# Altium PCB PPE2.PcbDoc (part 2 of 2)
Units mm, origin at the board's own origin, x right, y up, seen from the top; angles counter-clockwise.
Board outline 200 x 160 mm, 2 copper layers (Top Layer, Bottom Layer); 211 components, 151 nets, 640 pads, 213 vias.
Unrouted connection lines stored in the file: 3.
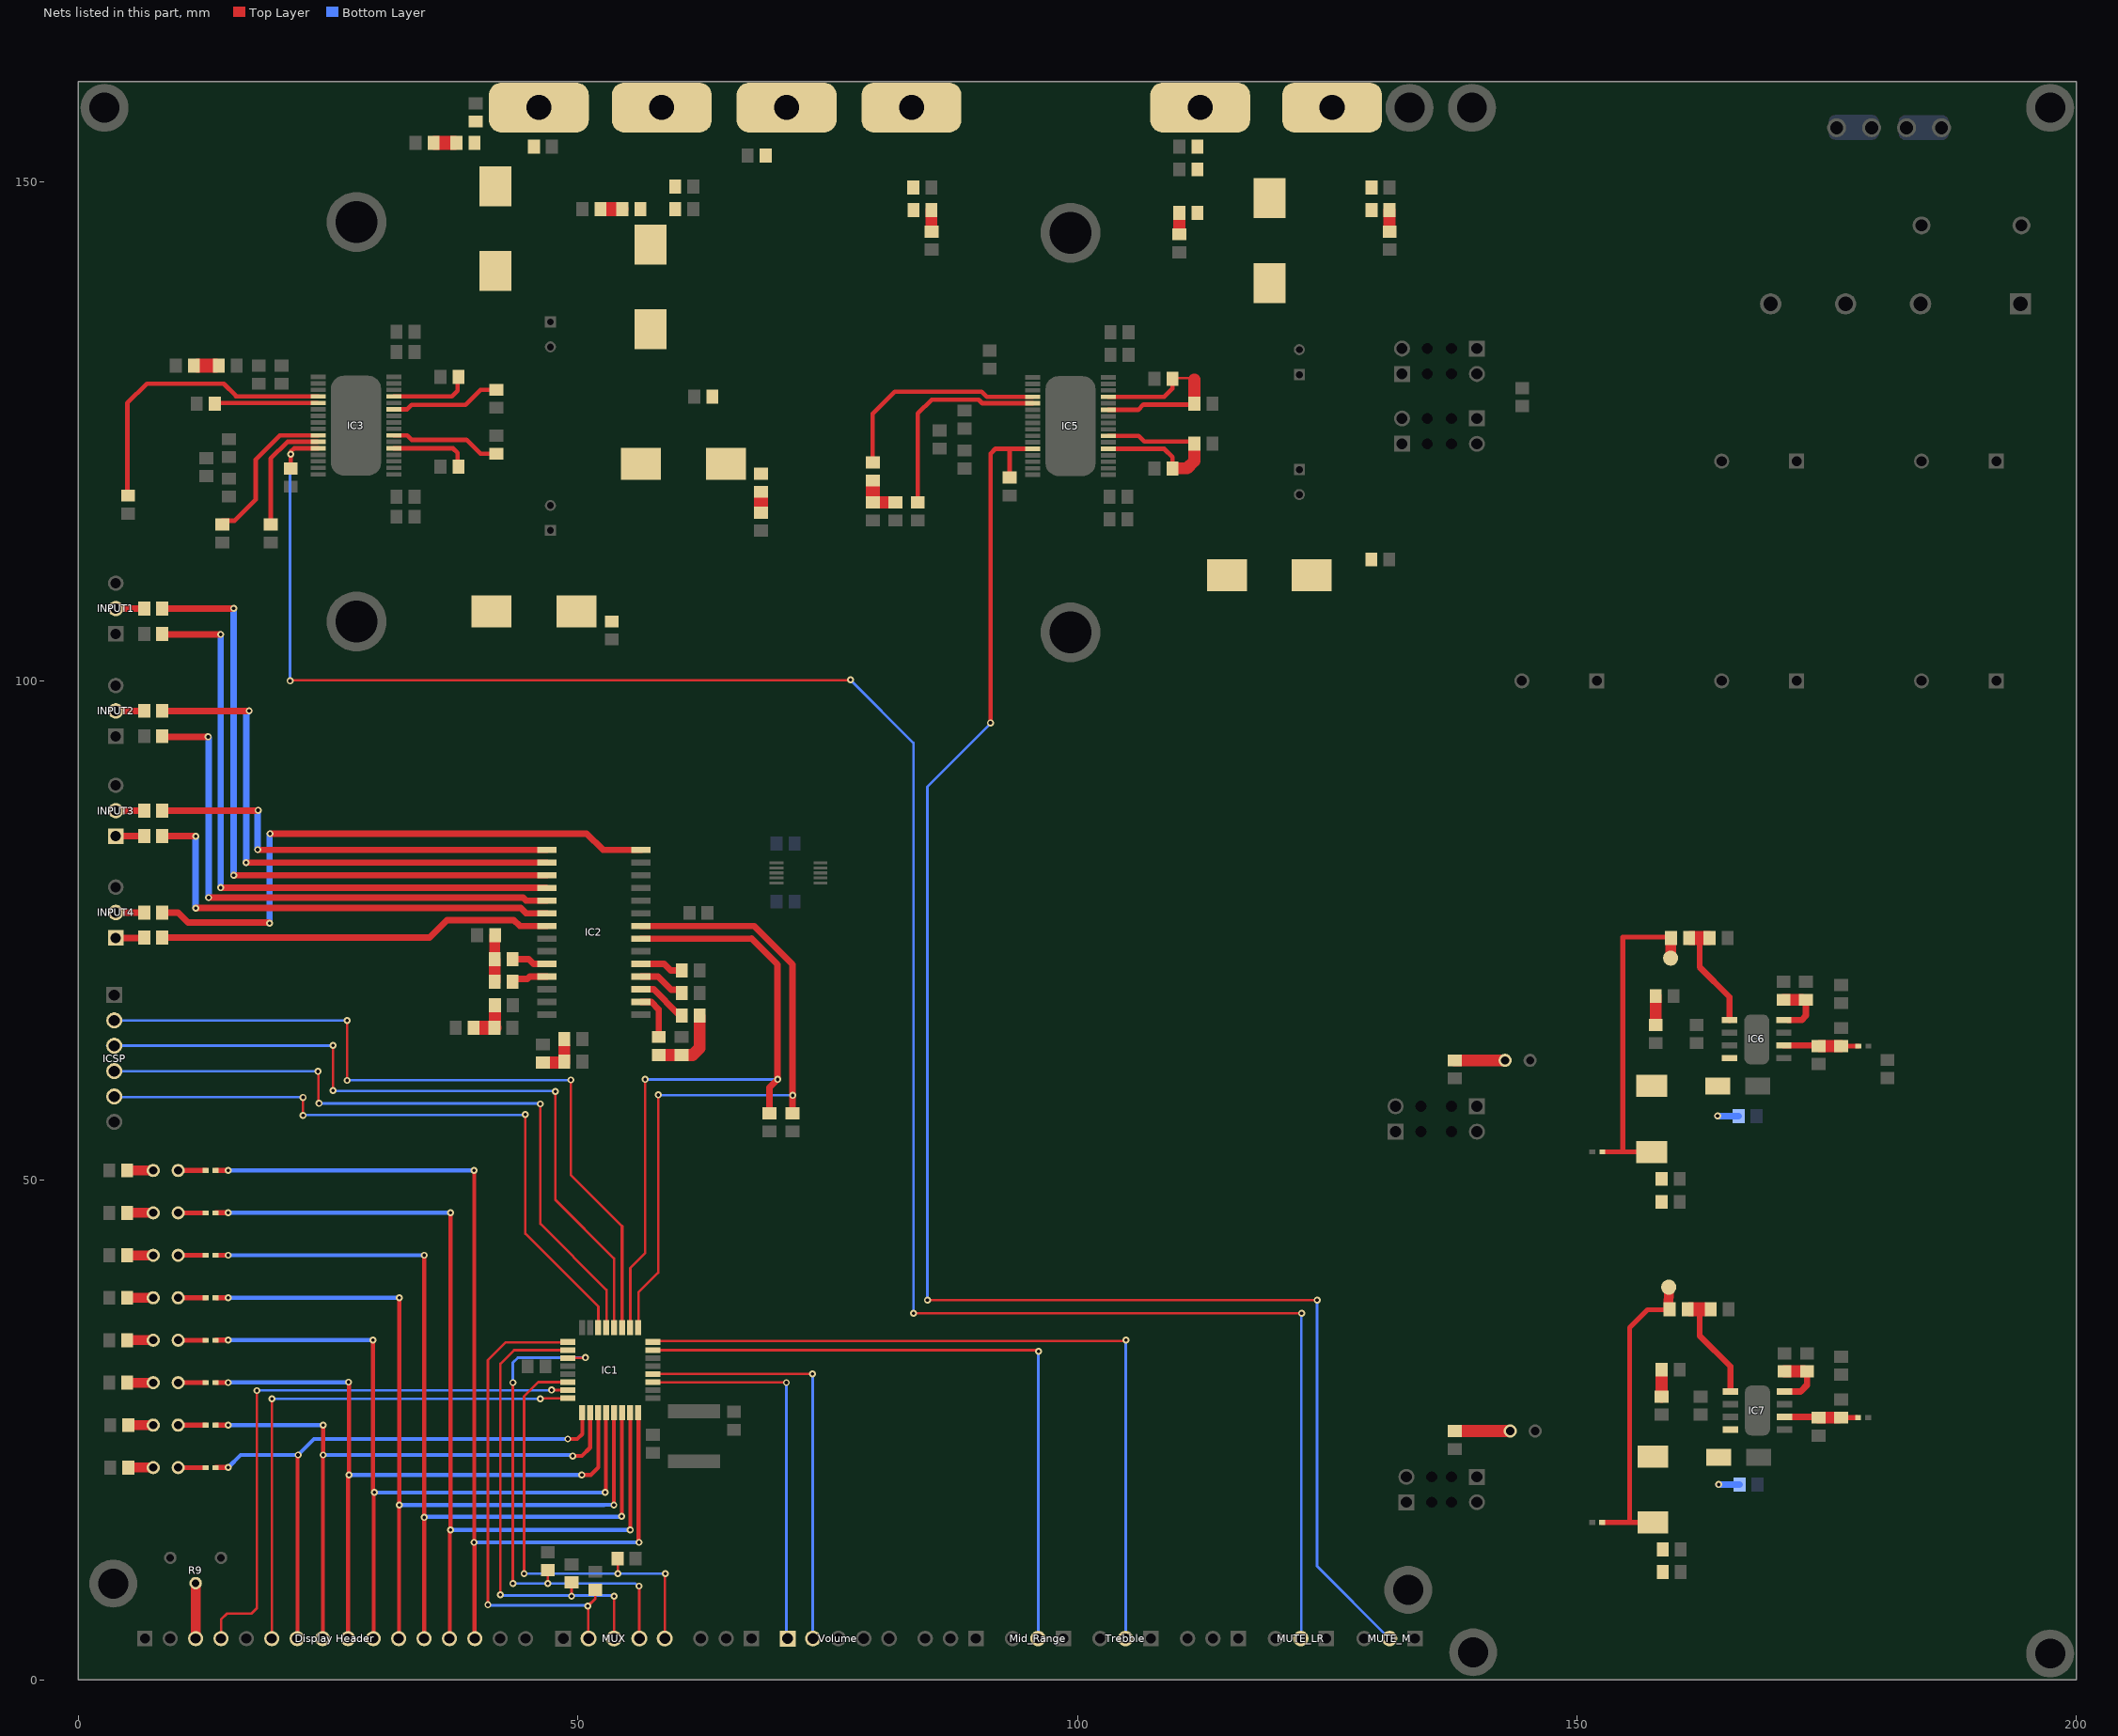
[diagram p2: the nets of this part, all layers, seen from the top]

## Via types
v1: diameter 0.7, hole 0.35, Top Layer to Bottom Layer, 159 vias
v2: diameter 1.27, hole 0.711, Top Layer to Bottom Layer, 38 vias
v3: diameter 1.1, hole 0.6, Top Layer to Bottom Layer, 16 vias

## Nets (pads, with @x,y where several pads share a name; then routed paths per layer and width w, separated by ;. In a path a pad name is that pad's centre, name@x,y a point inside that pad or via, vN(x,y) a via of type N, cw(c..) or ccw(c..) an arc to the next point about the centre after c; other vN are vias at no path point) (continued)
INPUTL_3: C11.1 INPUT3.1 | length 3
  Top Layer w0.254: INPUT3.1@3.7,84.5 INPUT3.1@3.75,84.45 ; C11.1@6.65,84.45 C11.1@6.675,84.475
  Top Layer w0.65: INPUT3.1@3.75,84.45 C11.1@6.6,84.45
INPUTL_4: C5.1 INPUT4.1 | length 2.9
  Top Layer w0.254: C5.1@6.57,74.27 C5.1@6.6,74.3
  Top Layer w0.65: INPUT4.1@3.75,74.27 C5.1@6.57,74.27
INPUTR_1: C13.1 INPUT1.2 | length 3.1
  Top Layer w0.254: C13.1@6.79,107.24 C13.1@6.85,107.3
  Top Layer w0.65: INPUT1.2@3.75,107.24 C13.1@6.79,107.24
INPUTR_2: C14.1 INPUT2.2 | length 2.8
  Top Layer w0.254: C14.1@6.49,96.99 C14.1@6.55,97.05
  Top Layer w0.65: INPUT2.2@3.75,96.99 C14.1@6.49,96.99
INPUTR_3: C6.1 INPUT3.2 | length 3.2
  Top Layer w0.254: INPUT3.2@3.45,87.05 3.5,87 INPUT3.2@3.75,87
  Top Layer w0.65: INPUT3.2@3.75,87 C6.1@6.65,87
INPUTR_4: C7.1 INPUT4.2 | length 3.1
  Top Layer w0.254: INPUT4.2@3.55,76.75 3.61,76.81 INPUT4.2@3.75,76.81 ; C7.1@6.59,76.81 C7.1@6.6,76.8
  Top Layer w0.65: INPUT4.2@3.75,76.81 C7.1@6.59,76.81
L_IN1: C3.2 IC2.4 | length 63.9
  Top Layer w0.254: C3.2@8.45,104.7 C3.2@8.5,104.65 ; v1(14.25,79.3) v1@14.265,79.285 ; IC2.4@46.835,79.285 IC2.4@46.9,79.35
  Top Layer w0.65: C3.2@8.5,104.65 v1(14.25,104.65) ; v1@14.265,79.285 IC2.4@46.835,79.285
  Bottom Layer w0.65: v1(14.25,79.3) v1(14.25,104.65)
L_IN2: C4.2 IC2.5 | length 54.6
  Top Layer w0.254: C4.2@8.5,94.45 C4.2@8.55,94.4
  Top Layer w0.65: C4.2@8.55,94.4 v1(13,94.4) ; v1(13.05,78.3) 44.528,78.3 44.828,78 IC2.5@46.901,78
  Bottom Layer w0.65: v1(13,94.4) 13,94.386 13.05,94.336 v1(13.05,78.3)
L_IN3: C11.2 IC2.6 | length 45.9
  Top Layer w0.65: C11.2@8.4,84.45 v1(11.75,84.45) ; v1(11.75,77.25) 44.3,77.25 44.82,76.73 IC2.6@46.901,76.73
  Bottom Layer w0.65: v1(11.75,77.25) v1(11.75,84.45)
L_IN4: C5.2 IC2.7 | length 39.5
  Top Layer w0.65: C5.2@8.4,74.3 35.15,74.3 36.9,76.05 43.6,76.05 44.19,75.46 IC2.7@46.901,75.46
LINN: C73.2 IC3.11 | length 12.1
  Top Layer w0.254: C73.2@19.26,115.555 C73.2@19.26,115.655 ; IC3.11@23.935,123.93 IC3.11@23.96,123.955
  Top Layer w0.45: C73.2@19.26,115.655 19.26,122.255 20.935,123.93 IC3.11@23.935,123.93
LNIP: C49.2 IC3.10 | length 15.6
  Top Layer w0.254: 20.16,124.555 20.185,124.58
  Top Layer w0.45: C49.2@14.34,115.97 14.4,116.03 15.635,116.03 17.76,118.155 17.76,122.155 20.16,124.555 ; 20.185,124.58 IC3.10@24.01,124.58
MidRangeADC: IC1.23 Mid_Range.2 | length 67.2
  Top Layer w0.254: IC1.23@57.5,33 95.879,33 96.004,32.875 v1(96.125,32.875)
  Bottom Layer w0.254: Mid_Range.2@96.125,4.375 96.094,4.406 96.094,32.844 v1(96.125,32.875)
MIN_L: C23.1 IC2.17 | length 5
  Top Layer w0.254: C23.1@60.2,66.7 C23.1@60.4,66.5
  Top Layer w0.65: IC2.17@56.325,69.11 57.59,69.11 C23.1@60,66.7
MIN_R: C20.1 IC2.10 | length 3.6
  Top Layer w0.254: C20.1@43.575,72.275 C20.1@43.7,72.15
  Top Layer w0.65: C20.1@43.7,72.15 45.075,72.15 45.575,71.65 IC2.10@46.901,71.65
MISO: IC1.28 ICSP.3 | length 75.2
  Top Layer w0.254: v1(25.5,59) v1(25.5,63.5) ; v1(47.75,58.9) 47.75,48.05 53.625,42.175 53.625,35.575 IC1.28@53.65,35.55
  Bottom Layer w0.254: ICSP.3@2.898,63.478 25.478,63.478 v1(25.5,63.5) ; v1(25.5,59) 25.55,58.95 47.7,58.95 v1(47.75,58.9)
MOSI: IC1.27 ICSP.2 | length 78.7
  Top Layer w0.254: v1(26.9,60) v1(26.9,66) ; v1(49.3,60.05) 49.3,50.55 54.425,45.425 ; IC1.27@54.425,35.675 IC1.27@54.45,35.65
  Top Layer w0.3: IC1.27@54.425,35.675 54.425,45.425
  Bottom Layer w0.254: ICSP.2@3.2,65.995 3.6,65.995 26.895,65.995 v1(26.9,66) ; v1(26.9,60) 26.925,60.025 49.275,60.025 v1(49.3,60.05)
MOUT_L: C24.1 IC2.16 | length 4.8
  Top Layer w0.65: IC2.16@56.325,67.84 57.357,67.84 58.1,67.097 58.1,64.621 58,64.521 C24.1@58,64.4
MOUT_R: C22.1 IC2.11 | length 3.3
  Top Layer w0.254: C22.1@43.7,70.025 C22.1@43.825,70.15
  Top Layer w0.65: C22.1@43.825,70.15 44.95,70.15 45.18,70.38 IC2.11@46.901,70.38
MUTE: IC3.12 MUTE_LR.2 R23.2 | length 220.7
  Top Layer w0.254: v1(21.2,100) 21.25,100.05 77.25,100.05 v1(77.3,100.1) ; v1@21.26,122.54 v1(21.26,122.69) ; v1(83.6,36.7) v1(122.45,36.7)
  Top Layer w0.45: R23.2@21.26,121.255 v1@21.26,122.54 ; v1(21.26,122.69) 21.26,122.955 21.585,123.28 IC3.12@24.01,123.28
  Bottom Layer w0.254: v1(21.2,100) v1@21.2,122.7 ; v1(77.3,100.1) 83.6,93.8 v1(83.6,36.7) ; MUTE_LR.2@122.35,4.35 122.412,4.412 122.412,36.662 v1(122.45,36.7)
MUTE_M: IC5.12 MUTE_M.2 R34.2 | length 170.5
  Top Layer w0.254: v1(85,38) v1(124,38)
  Top Layer w0.45: v1@91.32,95.8 91.32,122.76 91.795,123.235 93.22,123.235 ; R34.2@93.22,120.36 93.22,123.235 ; IC5.12@95.532,123.235 93.22,123.235
  Bottom Layer w0.254: v1(85,38) 85,89.4 91.3,95.7 v1(91.3,95.8) ; v1(124,38) 124,11.375 MUTE_M.2@131.25,4.125
MUX0: IC1.1 MUX.2 R40.2 | length 48
  Top Layer w0.254: v1(41,7.5) 41,32 42.775,33.775 IC1.1@48.65,33.775 ; MUX.2@51.08,4.125 51.04,4.165 51.04,7.335 v1(51,7.375) 51.75,8.125 R40.2@51.75,8.875
  Bottom Layer w0.254: v1(41,7.5) 41.062,7.438 50.937,7.438 v1(51,7.375)
MUX1: IC1.2 MUX.3 R39.2 | length 47.5
  Top Layer w0.254: v1(42.25,8.5) 42.25,31.625 43.625,33 IC1.2@49,33 ; v1(49.375,8.375) R39.2@49.375,9.625 ; MUX.3@53.62,4.125 53.623,4.127 53.623,8.373 v1(53.625,8.375)
  Bottom Layer w0.254: v1(42.25,8.5) 42.312,8.438 v1@49.312,8.438 ; v1(49.375,8.375) v1@49.312,8.438 ; v1(53.625,8.375) 53.562,8.438 v1@49.312,8.438
MUX2: IC1.3 MUX.4 R38.2 | length 50.3
  Top Layer w0.254: v1(43.5,9.625) v1(43.5,29.75) ; v1(47,9.625) R38.2@47,10.625 ; IC1.3@49,32.2 49.025,32.225 50.725,32.225 v1(50.75,32.25) ; v1(56.125,9.375) 56.143,9.357 56.143,4.143 MUX.4@56.16,4.125
  Bottom Layer w0.254: v1(43.5,9.625) v1(47,9.625) 55.754,9.625 56.004,9.375 v1(56.125,9.375) ; v1(43.5,29.75) 43.5,31.75 44,32.25 v1(50.75,32.25)
MUX3: IC1.6 MUX.5 R37.2 | length 44.7
  Top Layer w0.254: v1(44.625,10.625) 44.625,28.375 46.05,29.8 IC1.6@49,29.8 ; v1(54,10.625) R37.2@54,12 ; MUX.5@58.7,4.125 58.725,4.15 58.725,10.6 v1(58.75,10.625)
  Bottom Layer w0.254: v1(44.625,10.625) v1(54,10.625) v1(58.75,10.625)
NetC8_1: C8.1 R10.1 | length 1.8
  Top Layer w1.4: C8.1@11.96,131.555 R10.1@13.76,131.555
NetC20_2: C20.2 C22.2 R1.2 | length 4.5
  Top Layer w0.254: R1.2@41.675,74.25 R1.2@41.7,74.275
  Top Layer w1.1: C20.2@41.675,72.15 R1.2@41.675,74.5
  Top Layer w1.2: C22.2@41.675,69.896 C20.2@41.675,72.05
NetC23_2: C23.2 C24.2 R3.2 | length 7.5
  Top Layer w1.2: C24.2@58.1,62.546 R3.2@60.354,62.546 ; R3.2@60.4,62.546 61.497,62.546 62.2,63.249 C23.2@62.2,66.4
NetC25_2: C25.2 C26.2 R5.2 | length 4.2
  Top Layer w0.254: R5.2@39.7,65.4 R5.2@39.829,65.271
  Top Layer w1.2: C26.2@41.7,65.321 C25.2@41.7,67.525
  Top Layer w1.4: R5.2@39.829,65.271 C26.2@41.65,65.271
NetC27_2: C27.2 C28.2 R7.2 | length 3.5
  Top Layer w1.2: C27.2@46.5,61.8 48.654,61.8 R7.2@48.654,61.9 ; R7.2@48.654,62.2 48.654,63.397
NetC34_1: C34.1 R11.2 | length 2.1
  Top Layer w0.254: C34.1@37.66,153.855 C34.1@37.76,153.755
  Top Layer w1.4: R11.2@35.66,153.855 C34.1@37.66,153.855
NetC39_2: C39.2 R12.1 | length 2.1
  Top Layer w0.254: C39.2@54.364,147.219 C39.2@54.46,147.124
  Top Layer w1.4: R12.1@52.406,147.219 C39.2@54.364,147.219
NetC40_1: C40.1 R13.2 | length 1.8
  Top Layer w1.4: R13.2@68.35,117.069 C40.1@68.35,118.84
NetC45_2: C45.2 R15.1 | length 2.1
  Top Layer w1.2: R15.1@85.393,145.006 C45.2@85.393,147.133
NetC59_1: C59.1 R29.1 R30.1 | length 4
  Top Layer w1.2: R30.1@79.52,117.86 R29.1@81.774,117.86
  Top Layer w1.4: R30.1@79.52,118.006 C59.1@79.52,119.758
NetC61_1: C61.1 R32.2 | length 2.1
  Top Layer w0.254: R32.2@110.3,144.8 R32.2@110.32,144.82
  Top Layer w1.2: R32.2@110.22,144.82 C61.1@110.22,146.86
NetC68_2: C68.2 R33.1 | length 2.1
  Top Layer w1.2: R33.1@131.249,144.991 C68.2@131.249,147.128
NetC79_2: C79.2 C80.2 L8.2 pad.14 R17.1 SB_9V.1 | length 33.2
  Top Layer w0.5: SB_9V.1@152.612,52.842 154.738,52.842 ; L8.2@157.51,52.842 154.738,52.842 ; R17.1@159.389,74.342 154.589,74.342 154.589,52.991 154.738,52.842
  Top Layer w1.1: pad.14@159.389,72.242 R17.1@159.389,74.142
NetC81_2: C81.2 C82.2 L9.2 pad.13 R21.1 SB_5V.2 | length 30.3
  Top Layer w0.5: SB_5V.2@152.54,15.74 152.736,15.74 152.739,15.743 155.289,15.743 155.489,15.743 ; L9.2@156.589,15.743 155.489,15.743 ; R21.1@158.989,37.043 157.089,37.043 155.289,35.243 155.289,15.943 155.489,15.743
  Top Layer w1: R21.1@159.178,37.037 pad.13@159.2,39.3
NetC84_1: C84.1 R45.1 | length 2.7
  Top Layer w1.2: R45.1@157.889,65.742 C84.1@157.889,68.442
NetC89_1: C89.1 R46.1 | length 2.5
  Top Layer w1.2: R46.1@158.489,28.343 C89.1@158.489,30.843
NetLED1_1: LED1.1 SB1.1 | length 2.8
  Top Layer w0.5: LED1.1@10,50.99 SB1.1@12.75,50.99
NetLED1_2: LED1.2 R2.2 | length 2.6
  Top Layer w1: R2.2@4.9,50.99 LED1.2@7.5,50.99
NetLED2_1: LED2.1 SB2.1 | length 2.8
  Top Layer w0.5: LED2.1@10,46.74 SB2.1@12.75,46.74
NetLED2_2: LED2.2 R4.2 | length 2.6
  Top Layer w1: R4.2@4.9,46.74 LED2.2@7.5,46.74
NetLED3_1: LED3.1 SB3.1 | length 2.8
  Top Layer w0.5: LED3.1@10,42.49 SB3.1@12.75,42.49
NetLED3_2: LED3.2 R6.2 | length 2.6
  Top Layer w1: R6.2@4.9,42.49 LED3.2@7.5,42.49
NetLED4_1: LED4.1 SB4.1 | length 2.8
  Top Layer w0.5: LED4.1@10,38.24 SB4.1@12.75,38.24
NetLED4_2: LED4.2 R8.2 | length 2.6
  Top Layer w1: R8.2@4.9,38.24 LED4.2@7.5,38.24
NetLED5_1: LED5.1 SB5.1 | length 2.8
  Top Layer w0.5: LED5.1@10,33.99 SB5.1@12.75,33.99
NetLED5_2: LED5.2 R14.2 | length 2.6
  Top Layer w1: R14.2@4.9,33.99 LED5.2@7.5,33.99
NetLED6_1: LED6.1 SB6.1 | length 2.8
  Top Layer w0.5: LED6.1@10,29.74 SB6.1@12.75,29.74
NetLED6_2: LED6.2 R16.2 | length 2.6
  Top Layer w1: R16.2@4.9,29.74 LED6.2@7.5,29.74
NetLED7_1: LED7.1 SB7.1 | length 2.8
  Top Layer w0.5: LED7.1@10,25.49 SB7.1@12.75,25.49
NetLED7_2: LED7.2 R18.2 | length 2.7
  Top Layer w0.254: R18.2@4.9,25.24 R18.2@5.15,25.49
  Top Layer w1: R18.2@5.15,25.49 LED7.2@7.5,25.49
NetLED8_1: LED8.1 SB8.1 | length 2.8
  Top Layer w0.5: LED8.1@10,21.24 SB8.1@12.75,21.24
NetLED8_2: LED8.2 R20.2 | length 2.5
  Top Layer w1: R20.2@5,21.24 LED8.2@7.5,21.24
NetLED9_1: LED9.1 R49.2 | length 5.4
  Top Layer w0.254: LED9.1@143.01,24.9 LED9.1@143.13,25.02
  Top Layer w1.2: R49.2@137.77,24.9 LED9.1@143.01,24.9
NetLED10_1: LED10.1 R50.2 | length 5
  Top Layer w0.254: LED10.1@142.61,62.01 LED10.1@142.73,62.13
  Top Layer w1.2: R50.2@137.77,62.01 LED10.1@142.61,62.01
OUT_L_1: C37.1 C38.1 C39.1 L3.2 pad.16
OUT_L_2: C34.2 C35.2 C36.2 L2.2 pad.15
OUT_M_1: C66.1 C67.1 C68.1 L7.2 pad.19 | length 0.5
  Top Layer w0.254: L7.2@123.095,110.931 L7.2@123.47,110.556
OUT_M_2: C61.2 C62.2 C63.2 L6.2 pad.20
OUT_R_1: C40.2 C41.2 C42.2 L4.2 pad.17
OUT_R_2: C43.1 C44.1 C45.1 L5.2 pad.18
OUTNL: C33.2 IC3.21 L5.1 | length 7.5
  Top Layer w0.45: IC3.21@31.586,123.28 37.52,123.28 37.96,122.84 C33.2@37.96,121.94
OUTNL_M: C65.2 C69.2 IC5.21 IC5.23 L7.1 | length 20.8
  Top Layer w0.254: C65.2@111.42,123.76 C65.2@111.52,123.66
  Top Layer w0.45: IC5.21@103.108,123.235 108.695,123.235 109.52,122.41 C69.2@109.52,121.26 C69.2@109.52,121.06 ; IC5.23@103.108,124.535 106.145,124.535 106.72,123.96 C65.2@111.32,123.96
  Top Layer w1.2: C69.2@109.623,121.275 110.989,121.275 111.72,122.006 C65.2@111.72,123.76
OUTNR: C31.2 IC3.27 L3.1 | length 10.8
  Top Layer w0.45: IC3.27@31.586,127.18 32.9,127.18 33.36,127.64 38.76,127.64 40.26,129.14 C31.2@41.56,129.14
OUTNR_M: C60.2 C64.2 IC5.27 IC5.29 L6.1 | length 20.2
  Top Layer w0.254: C60.2@109.675,130.351 109.7,130.326 111.571,130.326 111.72,130.177
  Top Layer w0.45: IC5.27@103.108,127.135 106.095,127.135 106.62,127.66 C64.2@111.32,127.66 ; IC5.29@103.108,128.435 108.695,128.435 109.52,129.26 C60.2@109.52,129.76
  Top Layer w1.2: C64.2@111.72,127.76 111.72,130.177
OUTPL: C32.2 IC3.23 L4.1 | length 10.8
  Top Layer w0.45: IC3.23@31.586,124.58 32.92,124.58 33.36,124.14 38.86,124.14 40.26,122.74 C32.2@41.66,122.74
OUTPR: C30.2 IC3.29 L2.1 | length 7.7
  Top Layer w0.45: IC3.29@31.586,128.48 37.4,128.48 37.96,129.04 C30.2@37.96,130.14
OUTPUT_SELECT: "OUTPUT SELECT.2" IC4.1 IC4.5 | length 121.6
  Top Layer w0.254: 72.192,76.7 72.192,79.092 72.9,79.8 ; 72.2,76.7 72.8,76.1 v1(82.2,76.1) ; IC4.1@74.292,79.775 72.925,79.775 72.9,79.8 ; IC4.5@74.292,81.775 73.075,81.775 72.9,81.6 72.9,79.8 ; v1@82.225,35.125 v1@113.625,35.125
  Bottom Layer w0.254: v1(82.2,35.15) v1(82.2,76.1) ; 113.61,4.165 v1@113.61,35.06
  other v1: 113.65,35.1
PA0: "Display Header.7" IC1.9 SB8.2 | length 58.7
  Top Layer w0.254: 21.911,4.125 21.955,4.17 ; v1@21.955,22.455 v1(22,22.5) ; IC1.9@50.375,26.75 IC1.9@50.45,26.675
  Top Layer w0.4: v1@14.995,21.245 v1(15,21.25) ; 21.955,4.17 v1@21.955,22.455 ; v1(49,24.1) 49.003,24.103 49.95,24.103 50.45,24.603 IC1.9@50.45,26.675
  Top Layer w0.5: SB8.2@13.755,21.245 v1@14.995,21.245
  Bottom Layer w0.4: v1(15,21.25) 16.25,22.5 v1(22,22.5) 23.6,24.1 v1(49,24.1)
PA1: "Display Header.8" IC1.10 SB7.2 | length 62.6
  Top Layer w0.254: SB7.2@13.75,25.5 SB7.2@13.755,25.495 ; v1@14.995,25.495 v1(15,25.5) ; 24.451,4.125 24.475,4.15
  Top Layer w0.4: 24.475,4.15 24.475,22.475 v1(24.5,22.5) v1(24.5,25.5) ; v1(49.5,22.4) 50.4,22.4 51.235,23.235 IC1.10@51.235,26.609
  Top Layer w0.5: SB7.2@13.755,25.495 v1@14.995,25.495
  Bottom Layer w0.4: v1(15,25.5) v1(24.5,25.5) ; v1(24.5,22.5) 49.319,22.5 49.419,22.4 v1(49.5,22.4)
PA2: "Display Header.9" IC1.11 SB6.2 | length 69.5
  Top Layer w0.254: SB6.2@13.75,29.74 SB6.2@13.755,29.745 ; v1@14.995,29.745 v1(15,29.75) ; 26.991,4.125 26.995,4.13
  Top Layer w0.4: 26.995,4.13 26.995,20.314 27.1,20.419 27.1,29.752 v1(27.058,29.794) ; v1(50.4,20.5) 51.3,20.5 52.05,21.25 IC1.11@52.05,26.396
  Top Layer w0.5: SB6.2@13.755,29.745 v1@14.995,29.745
  Bottom Layer w0.4: v1(15,29.75) 15.022,29.772 27.036,29.772 v1(27.058,29.794) ; v1(27.1,20.5) v1(50.4,20.5)
PA3: "Display Header.10" IC1.12 SB5.2 | length 76.3
  Top Layer w0.254: SB5.2@13.75,33.99 SB5.2@13.755,33.995 ; v1@14.995,33.995 v1(15,34) ; v1@29.5,18.996 29.621,18.875 v1@29.625,18.875 ; 29.531,4.125 29.578,4.172 ; v1(52.75,18.75) v1@52.8,18.8 ; IC1.12@52.8,26.3 IC1.12@52.85,26.35
  Top Layer w0.4: v1@29.5,18.996 v1(29.5,34) ; 29.578,4.172 v1@29.578,18.703 ; v1@52.8,18.8 IC1.12@52.8,26.3
  Top Layer w0.5: SB5.2@13.755,33.995 v1@14.995,33.995
  Bottom Layer w0.4: v1(15,34) v1(29.5,34) ; v1(29.625,18.75) v1(52.75,18.75)
PA4: "Display Header.11" IC1.13 SB4.2 | length 83.2
  Top Layer w0.254: SB4.2@13.75,38.24 SB4.2@13.755,38.245 ; SB4.2@13.875,38.25 SB4.2@13.88,38.245 ; v1@14.995,38.245 v1(15,38.25) ; 32.071,4.125 32.098,4.152 ; v1@32.098,17.473 v1(32.125,17.5)
  Top Layer w0.4: 32.098,4.152 v1@32.098,17.473 ; v1(32.125,17.5) v1(32.125,38.25) ; v1(53.609,17.5) 53.609,26.709 IC1.13@53.65,26.75
  Top Layer w0.5: SB4.2@13.88,38.245 v1@14.995,38.245
  Bottom Layer w0.254: 52.629,17.5 52.642,17.513 ; v1@53.596,17.513 v1(53.609,17.5)
  Bottom Layer w0.4: v1(15,38.25) v1(32.125,38.25) ; v1(32.125,17.5) 52.629,17.5 ; 52.642,17.513 v1@53.596,17.513
PA5: "Display Header.12" IC1.14 SB3.2 | length 89.6
  Top Layer w0.254: SB3.2@13.75,42.49 SB3.2@13.755,42.495 ; v1@14.995,42.495 v1(15,42.5) ; 34.611,4.125 34.618,4.132 ; v1(54.375,16.375) v1@54.413,16.413 ; IC1.14@54.413,26.788 IC1.14@54.5,26.875
  Top Layer w0.4: 34.618,4.132 v1@34.618,16.243 ; v1(34.625,16.25) v1(34.625,42.5) ; v1@54.413,16.413 IC1.14@54.413,26.788
  Top Layer w0.5: SB3.2@13.755,42.495 v1@14.995,42.495
  Bottom Layer w0.254: v1(34.625,16.25) v1@34.687,16.312 ; v1@54.312,16.312 v1(54.375,16.375)
  Bottom Layer w0.4: v1(15,42.5) v1(34.625,42.5) ; v1@34.687,16.312 v1@54.312,16.312
PA6: "Display Header.13" IC1.15 SB2.2 | length 95.6
  Top Layer w0.254: SB2.2@13.75,46.74 SB2.2@13.755,46.745 ; v1@14.995,46.745 v1(15,46.75) ; 37.151,4.125 37.2,4.175
  Top Layer w0.4: 37.2,4.175 v1@37.2,14.95 ; v1(37.25,46.75) 37.25,15.129 v1@37.254,15.125 ; v1(55.25,15) IC1.15@55.25,26.625
  Top Layer w0.5: SB2.2@13.755,46.745 v1@14.995,46.745
  Bottom Layer w0.4: v1(15,46.75) v1(37.25,46.75) ; v1(37.25,15) v1(55.25,15)
PA7: "Display Header.14" IC1.16 SB1.2 | length 102.3
  Top Layer w0.254: SB1.2@13.75,50.99 SB1.2@13.755,50.995 ; v1@14.995,50.995 v1(15,51) ; 39.658,4.158 39.691,4.125
  Top Layer w0.4: v1(39.625,51) v1(39.625,13.75) 39.658,13.717 39.658,4.158 ; IC1.16@56.05,26.75 56.088,26.713 56.088,13.787 v1(56.125,13.75)
  Top Layer w0.5: SB1.2@13.755,50.995 v1@14.995,50.995
  Bottom Layer w0.4: v1(15,51) v1(39.625,51) ; v1(39.625,13.75) v1(56.125,13.75)
PA8: "Display Header.4" IC1.7 | length 58.8
  Top Layer w0.254: 14.291,4.125 14.291,6.041 14.875,6.625 17.351,6.625 17.875,7.149 v1(17.875,28.946) ; v1(47.375,29) IC1.7@48.875,29
  Bottom Layer w0.254: v1(17.875,28.946) 17.902,28.973 47.223,28.973 v1@47.375,29.125
PA9: "Display Header.6" IC1.8 | length 53.7
  Top Layer w0.254: 19.371,4.125 19.373,4.127 19.373,28.123 v1(19.375,28.125) ; v1(46.25,28.125) 46.287,28.163 48.963,28.163 IC1.8@49,28.125
  Bottom Layer w0.254: v1(19.375,28.125) v1(46.25,28.125)
PH_5V: C75.2 D2.1 IC7.8 L9.1 | length 2.1
  Bottom Layer w0.65: v1(164.189,19.543) C75.2@166.289,19.543
PH_9V: C74.2 D1.1 IC6.8 L8.1 | length 2.1
  Bottom Layer w0.65: v1(164.089,56.442) C74.2@166.189,56.442
R_IN1: C13.2 IC2.3 | length 65.2
  Top Layer w0.65: C13.2@8.45,107.25 v1(15.55,107.25) ; v1(15.55,80.55) 15.56,80.54 16.16,80.54 ; 16.16,80.54 IC2.3@46.901,80.54
  Bottom Layer w0.65: v1(15.55,80.55) v1(15.55,107.25)
R_IN2: C14.2 IC2.2 | length 54
  Top Layer w0.254: v1@16.85,81.8 v1@16.855,81.805 ; IC2.2@46.896,81.805 IC2.2@46.901,81.81
  Top Layer w0.65: C14.2@8.45,97 v1(17.1,97) ; v1@16.855,81.805 IC2.2@46.896,81.805
  Bottom Layer w0.254: v1@17.075,96.975 v1(17.1,97)
  Bottom Layer w0.65: v1(16.8,81.8) 16.8,96.686 17.09,96.977 v1@17.084,96.984
R_IN3: C6.2 IC2.1 | length 42.5
  Top Layer w0.254: IC2.1@46.891,83.09 IC2.1@46.901,83.08
  Top Layer w0.65: C6.2@8.45,87 17.936,87 17.986,87.05 v1(18,87.05) ; v1(17.95,83.1) 17.964,83.1 17.984,83.08 IC2.1@46.891,83.08
  Bottom Layer w0.65: v1(17.95,83.1) 17.95,86.986 18,87.036 v1(18,87.05)
R_IN4: C7.2 IC2.28 | length 57.9
  Top Layer w0.65: C7.2@8.4,76.8 10.001,76.8 11.001,75.8 v1@19.15,75.8 ; v1(19.2,84.7) 50.887,84.7 52.507,83.08 IC2.28@56.325,83.08
  Bottom Layer w0.65: v1(19.15,75.75) 19.15,84.636 19.2,84.686 v1(19.2,84.7)
RESET: IC1.29 ICSP.4 | length 70.8
  Top Layer w0.254: v1(24,60.9) 24.05,60.85 24.05,57.75 v1(24.1,57.7) ; v1(46.25,57.65) 46.25,45.65 52.872,39.028 52.872,35.472 IC1.29@52.85,35.45
  Bottom Layer w0.254: ICSP.4@3.6,60.908 23.992,60.908 v1(24,60.9) ; v1(24.1,57.7) 46.2,57.7 v1(46.25,57.65)
RINN: C72.2 IC3.5 | length 10.3
  Top Layer w0.254: C72.2@13.76,127.755 C72.2@13.835,127.83 ; IC3.5@23.96,127.855 23.935,127.83 IC3.5@24.01,127.83
  Top Layer w0.45: C72.2@13.835,127.83 IC3.5@23.935,127.83
RINN_M: C85.2 IC5.5 | length 21.1
  Top Layer w0.45: C85.2@84.029,117.86 84.029,126.769 85.42,128.16 90.12,128.16 90.495,127.785 IC5.5@95.532,127.785
RINP: C48.2 IC3.4 | length 29.5
  Top Layer w0.45: C48.2@4.91,118.74 4.91,120.49 4.91,127.805 6.86,129.755 14.56,129.755 15.76,128.555 ; 15.76,128.48 IC3.4@24.01,128.48
RINP_M: C59.2 IC5.4 | length 22
  Top Layer w0.45: C59.2@79.52,121.86 79.52,126.76 81.72,128.96 90.42,128.96 90.945,128.435 IC5.4@95.532,128.435
Rotary_N: IC1.20 Volume.2 | length 42.3
  Top Layer w0.254: IC1.20@57.5,30.6 57.513,30.613 73.488,30.613 v1(73.5,30.625)
  Bottom Layer w0.254: Volume.2@73.5,4.375 73.519,4.394 73.519,30.606 v1(73.5,30.625)
Rotary_P: IC1.19 Volume.1 | length 38.7
  Top Layer w0.254: IC1.19@57.825,29.8 57.85,29.775 70.85,29.775 v1(70.875,29.75)
  Bottom Layer w0.254: v1(70.875,29.75) 70.875,4.249 Volume.1@70.999,4.125
SCK: IC1.30 ICSP.5 | length 68.1
  Top Layer w0.254: v1(22.5,56.5) v1(22.5,58.3) ; v1(44.75,56.6) 44.75,44.65 52.05,37.35 IC1.30@52.05,35.25
  Bottom Layer w0.254: ICSP.5@2.912,58.338 22.463,58.338 v1(22.5,58.3) ; v1(22.5,56.5) 22.55,56.55 44.7,56.55 v1(44.75,56.6)
SCL: IC1.26 IC2.21 R36.1 | length 68.7
  Top Layer w0.254: IC1.26@55.25,35.25 55.25,41.224 56.75,42.724 v1(56.75,60.1)
  Top Layer w0.65: IC2.21@56.325,74.19 67.4,74.19 ; 67.4,74.2 70,71.6 v1(70,60.1) 69.2,59.3 R36.1@69.2,56.7
  Bottom Layer w0.254: v1(56.75,60.1) v1(70,60.1)
SDA: IC1.25 IC2.22 R35.1 | length 69.1
  Top Layer w0.254: IC1.25@56.05,35.45 56.075,35.475 56.075,38.775 58.05,40.75 v1(58.05,58.55)
  Top Layer w0.65: IC2.22@56.325,75.46 67.64,75.46 71.5,71.6 v1(71.5,58.5) R35.1@71.5,56.7
  Bottom Layer w0.254: v1(58.05,58.55) 58.075,58.525 71.475,58.525 v1(71.5,58.5)
SS_5V: C91.2 IC7.4 R44.1 | length 5.3
  Top Layer w0.254: R44.1@172.718,30.872 R44.1@172.789,30.943
  Top Layer w0.65: IC7.4@171.389,28.843 172.389,28.843 173.043,29.497 R44.1@173.043,30.872
  Top Layer w1.2: C91.2@170.789,30.872 R44.1@172.718,30.872
SS_9V: C90.2 IC6.4 R43.1 | length 5.6
  Top Layer w0.254: IC6.4@171.089,65.942 IC6.4@171.189,66.042 ; R43.1@172.518,68.071 R43.1@172.589,68.142
  Top Layer w0.65: IC6.4@171.189,66.042 172.489,66.042 172.943,66.496 R43.1@172.943,68.071
  Top Layer w1.2: C90.2@170.689,68.071 R43.1@172.518,68.071
TREBBLE_L: C17.1 IC2.18 | length 4.8
  Top Layer w0.65: IC2.18@56.325,70.38 58.02,70.38 59.333,69.067 60.125,69.067 60.4,68.792 C17.1@60.4,68.755
TREBBLE_R: C18.1 IC2.19 | length 4.1
  Top Layer w0.65: IC2.19@56.325,71.65 58.65,71.65 59.3,71 C18.1@60.2,71
TrebbleADC: IC1.24 Trebble.2 | length 76.9
  Top Layer w0.254: IC1.24@57.5,33.8 57.615,33.915 104.79,33.915 v1(104.875,34)
  Bottom Layer w0.254: v1(104.875,34) 104.846,33.971 104.846,4.724 104.944,4.625 Trebble.2@105,4.625
VIN_5V: C88.2 IC7.2 R42.1 SB_15V2.1 | length 6.6
  Top Layer w0.254: C88.2@173.754,26.308 C88.2@173.789,26.343
  Top Layer w0.5: R42.1@176.443,26.243 SB_15V2.1@177.989,26.243
  Top Layer w0.65: IC7.2@170.789,26.308 C88.2@173.754,26.308
  Top Layer w1.2: C88.2@174.189,26.243 R42.1@176.189,26.243
VIN_9V: C83.2 IC6.2 R41.1 SB_15V.2 | length 6.7
  Top Layer w0.254: C83.2@173.654,63.507 C83.2@173.689,63.542 ; C83.2@174.189,63.342 C83.2@174.289,63.442
  Top Layer w0.5: R41.1@176.789,63.442 SB_15V.2@178.189,63.442
  Top Layer w0.65: IC6.2@170.701,63.507 C83.2@173.654,63.507
  Top Layer w1.2: C83.2@174.289,63.442 R41.1@176.443,63.442
VO: "Display Header.3" R9.2 | length 5.3
  Top Layer w0.254: 11.75,4.5 11.875,4.375
  Top Layer w1: 11.75,4.5 R9.2@11.75,9.667
VSense_5V: IC7.5 R21.2 R27.1 | length 10.7
  Top Layer w0.6: 162.289,36.843 162.289,34.443 165.365,31.367 IC7.5@165.365,28.848
  Top Layer w1.4: R21.2@161.335,37.072 162.735,37.072
VSense_9V: IC6.5 R17.2 R25.1 | length 11.3
  Top Layer w0.254: R17.2@161.289,74.342 R17.2@161.389,74.242
  Top Layer w0.6: 162.289,74.142 162.289,71.342 165.277,68.354 IC6.5@165.277,66.047
  Top Layer w1.4: R17.2@161.389,74.242 162.289,74.242 R25.1@163.189,74.242
pads on no net: AMP_5V.MH1 AMP_5V.MH2 AMP_9V.MH1 AMP_9V.MH2 AMP_15V.MH1 AMP_15V.MH2 AMP_GND.MH1 AMP_GND.MH2 IC1.31 IC1.32 IC2.8 IC2.9 IC3.16 IC5.16 PSU_5V.MH1 PSU_5V.MH2 PSU_9V.MH1 PSU_9V.MH2 PSU_15V.MH1 PSU_15V.MH2 PSU_GND.MH1 PSU_GND.MH2 Volume.3

## Polygon pours and split planes (outlines as drawn)
GND on Top Layer "NONET_L-01_P-001" (solid, pour order 45): 59.8,78.8 59.8,76 69.1,76 72.8,72.3 72.8,34.1 58.7,34.1 58.7,27.6 56.7,27.6 56.7,0 136.7,0 136.7,160 0,160 0,79.7 48.1,79.7 49,78.8
GND on Top Layer "NONET_L-01_P-001" (solid, pour order 36): 183.4,0 136.6,0 136.6,75.5 152.9,75.5 152.1,74.7 152.1,9 184.2,9 183.4,8.2
GND on Top Layer "NONET_L-01_P-001" (solid, pour order 34): 183.3,63.626 183.3,0 200,0 200,76.43 198.61,76.43 183.3,76.43
GND on Top Layer "NONET_L-01_P-001" (solid, pour order 33): 136.6,75.44 136.6,160 171.15,160 171.15,133.55 200,133.55 200,75.4
GND on Top Layer "NONET_L-01_P-001" (solid, pour order 30): 54.917,75.785 68.981,75.785 72.558,72.208 72.558,34.3 56.4,34.3 56.4,29.362 55.902,28.864 55.902,0 0,0 0,71.2 29.5,71.2 29.5,60.9 68.748,60.9 68.748,71.84 67.993,72.595 54.917,72.595
GND on Top Layer "NONET_L-01_P-001" (solid, pour order 31): 68.081,61.7 30.9,61.7 30.9,72.6 0,72.6 0,79.756 54.548,79.756 54.548,71.983 68.081,71.983
+9 on Bottom Layer "NONET_L-01_P-001" (solid, pour order 50): 60.8,98.1 114.6,98.1 136.6,76.1 136.6,52.3 129.4,52.3 120,61.7 72.8,61.7 72.8,75 75.8,78 75.8,86.4 65.5,86.4 60.8,81.7
5V on Bottom Layer "NONET_L-01_P-001" (solid, pour order 49): 63.4,83 66.1,85.7 74.6,85.7 74.6,78.1 72.3,75.8 72.3,52.5 63.4,52.5 63.4,53
5V on Bottom Layer "NONET_L-01_P-001" (solid, pour order 48): 0,71.2 29.5,71.2 29.5,60.9 118,60.9 136.6,42.3 136.6,0 0,0
+9 on Bottom Layer "NONET_L-01_P-001" (solid, pour order 47): 61.7,98.1 0,98.1 0,72.6 30.9,72.6 30.9,61.7 61.7,61.7
15V on Bottom Layer "NONET_L-01_P-001" (solid, pour order 46): 136.6,79.2 115,100.8 0,100.8 0,160 136.7,160 136.7,79.2
5V on Bottom Layer "NONET_L-01_P-001" (solid, pour order 43): 152.1,15.2 136.5,15.2 136.5,26 152.1,26
+9 on Bottom Layer "NONET_L-01_P-001" (solid, pour order 42): 152.1,52.3 136.5,52.3 136.5,63.1 152.1,63.1
15V on Bottom Layer "NONET_L-01_P-001" (solid, pour order 37): 200,140.1 200,0 178.4,0 178.4,79.2 136.6,79.2 136.6,160 171.2,160 171.2,133.6 188.4,133.6 188.4,140.1

## Other copper
Top Layer:
  region net OUT_M_2: 121,150.5 117.5,154 117.5,160 107.1,160 107.1,154.7 111.4,154.7 111.4,146 120.7,146 121,146.3
  region net OUT_R_2: 78.2,160 88.6,160 88.6,154.7 78.2,154.7 78.2,156.3
  region net OUT_R_1: 68.1,154.7 65.7,154.7 65.7,160 68.4,160 68.4,155
  region net OUT_L_1: 53.2,154.7 53.2,160 63.6,160 63.6,154.7
  region net OUT_L_1: 55.5,160 60.46,160 60.46,143.04 58.96,141.54 55.56,141.54 55.46,141.64 55.46,159.96
  region net OUT_L_2: 46.5,160 51.3,160 51.3,154.7 46.5,154.7
  region net OUT_L_2: 46.5,147.44 38.96,147.44 38.96,156.74 40.94,156.74 40.94,160 46.5,160
  region net OUT_R_1: 68.1,134.58 68.1,160 76,160 76,136.68 69.16,129.84 69.16,120.14 69.06,120.04 62.86,120.04 62.66,120.24 62.66,129.14 62.86,129.34
  region net GND: 183.289,64.142 183.289,60.942 184.389,60.942 184.389,64.142
  region net GND: 162.1,119.17 165.08,119.17 167.28,121.37 167.28,124.58 165.95,125.91 164.68,124.64 160.89,124.64
  region net GND: 183.05,120.21 186.97,120.21 186.96,120.22 186.96,125.56 183.04,125.56 181.95,124.47 181.95,122.11
  region net GND: 182.41,102.17 182.41,97.62 182.45,97.58 182.71,97.84 185.91,97.84 185.91,98.01 188.16,100.26 187.68,100.74 187.68,102.94
  region net GND: 162.17,101.99 162.17,97.67 163.04,96.8 167.58,96.8 167.58,101.04 167.71,101.17 166.45,102.43 164.25,102.43
  region net GND: 141.93,101.78 141.93,97.63 142.06,97.5 142.36,97.8 145.61,97.8 145.61,100.18 147.73,102.3 143.79,102.3
  region net GND: 166.689,69.042 164.789,70.942 164.789,75.44 145.989,75.44 145.989,82.742 166.889,82.742 166.689,82.542
  region net GND: 163.429,63.182 163.289,63.042 163.289,63.942 163.399,63.832 166.929,63.832 166.929,63.182
  region net GND: 156.889,64.442 156.889,62.842 163.089,62.842 163.289,63.042 163.289,63.942 162.789,64.442
  region net GND: 166.3,53.6 169.7,53.6 169.7,81.9 166.3,81.9
  region net GND: 184.389,45.542 184.389,60.942 176.389,60.942 174.989,62.342 173.389,62.342 173.389,55.142 162.289,55.142 159.589,52.442 159.589,45.542
  region net PH_9V: 166.089,58.642 165.789,58.342 155.889,58.342 155.889,60.642 162.389,60.642 164.389,62.642 166.089,62.642
  region net PH_9V: 165.789,58.342 165.089,57.642 165.089,55.442 162.589,55.442 162.589,58.342
  region net NetC79_2: 159.189,54.042 159.189,46.842 155.789,46.842 155.789,54.042
  region net GND: 177.389,69.042 177.389,64.142 184.389,64.142 184.389,68.842 184.189,69.042
  region net GND: 184.789,68.842 184.789,82.742 176.089,82.742 169.989,82.742 169.989,69.142 175.589,69.142 175.889,68.842 176.689,68.842
  region net GND: 24.998,130.205 22.119,130.205 22.119,130.923 24.998,130.923
  region net GND: 61.205,63.252 61.494,63.541 61.494,65.173 61.313,65.354 61.272,65.313 59.41,65.313 59.41,64.949 59.283,64.822 59.364,64.741 59.364,63.404 60.478,63.404 60.63,63.252
  region net GND: 54.974,72.595 54.974,74.026 55.466,73.534 55.972,73.534 55.972,73.248 55.319,72.595
  region net GND: 55.3,72.595 55.3,73.611 57.555,73.611 57.555,72.595
  region net GND: 96.528,122.81 96.591,122.747 96.591,121.077 96.574,121.06 96.262,121.06 96.262,122.671 96.123,122.81
  region net OUTNL: 37.36,122.24 38.76,122.24 43.46,117.54 43.46,105.252 39.295,105.252 37.36,107.187
  region net GND: 102.063,124.11 102.008,124.055 102.008,123.618 102.05,123.66 102.517,123.66 102.517,123.724 102.903,124.11
  region net GND: 102.052,126.06 102.039,126.047 102.039,125.577 102.072,125.61 102.539,125.61 102.989,126.06
  region net GND: 102.404,127.56 102.058,127.56 102.058,128.01 102.099,128.01 102.411,128.01 102.411,127.567
  region net GND: 96.521,125.41 96.521,119.66 96.525,119.656 102.087,119.656 102.087,125.443 102.054,125.41
  region net GND: 93.708,122.81 93.739,122.81 96.27,122.81 96.27,121.06 93.708,121.06 93.708,121.213
  region net GND: 96.521,131.515 96.521,125.41 96.52,125.41 94.52,125.41 94.522,125.408 94.522,123.66 102.087,123.66 102.087,131.515
  region net GND: 92.184,130.16 92.183,130.159 92.183,130.397 92.651,130.865 96.524,130.865 96.524,130.163 96.521,130.16
  region net GND: 31.029,126.105 30.643,126.105 30.643,125.664 30.652,125.655 30.86,125.655 30.86,125.935 31.03,126.105
  region net GND: 30.921,128.055 30.653,128.055 30.653,127.605 30.856,127.605 30.856,127.99
  region net GND: 30.874,123.705 30.644,123.705 30.644,124.169 30.658,124.155 30.886,124.155 30.886,123.717
  region net OUT_M_1: 121.42,108.954 129.814,108.954 130.12,109.26 130.22,109.36 130.22,113.36 130.22,160 125.62,160 125.62,156.66 126.92,155.36 126.92,115.86 123.32,112.26 121.52,112.26 121.42,112.16
  region net GND: 23,122.855 23,122.115 23,122.055 23,121.855 23,122.085 23,121.855 23,121.105 24.98,121.105 24.98,122.855 23.265,122.855
  region net GND: 24.67,125.455 24.98,125.455 24.98,125.02 24.965,125.005 24.67,125.005
  region net GND: 24.96,131.14 24.96,120.04 30.66,120.04 30.66,131.14
  region net GND: 172.489,31.943 178.089,31.943 178.389,31.643 180.189,31.643 180.189,27.043 184.789,27.043 184.789,45.543 172.489,45.543
  region net GND: 159.689,14.943 159.689,8.343 185.1,8.343 185.1,25.143 173.389,25.143 173.389,18.443 169.889,18.443 168.789,17.343 162.089,17.343
  region net NetC81_2: 155.889,16.943 155.889,9.643 159.289,9.643 159.289,16.943
  region net PH_5V: 165.989,21.243 165.289,20.543 165.289,18.343 162.589,18.343 162.589,21.243
  region net GND: 169.9,47.3 166.3,47.3 166.3,10.1 169.9,10.1
  region net PH_5V: 166.189,21.443 165.989,21.243 155.989,21.243 155.989,23.443 162.489,23.443 164.489,25.443 166.189,25.443
  region net GND: 163.829,25.983 163.689,25.843 163.689,26.743 163.799,26.633 164.039,26.633 167.049,26.633 167.049,25.983
  region net GND: 157.689,27.243 157.689,25.843 163.689,25.843 163.689,26.743 163.189,27.243
  region net OUTNL_M: 108.82,112.86 112.82,108.86 117.02,108.86 117.12,108.96 117.12,114.96 110.22,121.86 110.12,121.96 108.92,121.96 108.82,121.86
  region net OUT_R_2: 47.543,105.354 47.543,112.14 68.06,112.14 71.66,115.74 71.66,129.94 81.06,139.34 81.06,142.14 81.06,160 84.36,160 84.36,136.14 75.46,127.24 75.46,112.14 68.674,105.354
  region net OUTPL: 41.06,123.44 58.321,123.44 58.321,120.14 50.06,120.14 48.16,122.04 41.06,122.04
  region net OUTNR: 41.06,128.44 54.36,128.44 58.96,133.04 58.96,137.24 55.66,137.24 48.26,129.84 41.06,129.84
  region net OUTPR: 37.36,129.64 37.36,140.44 40.06,143.14 43.46,143.14 43.46,134.04 39.06,129.64
  region net OUTNR_M: 108.82,129.46 108.82,135.26 115.82,142.26 122.32,142.26 122.32,137.76 114.02,129.46
  region net 15V: 102.36,122.17 103.91,122.17 106.32,119.76 106.32,111.46 104.28,111.46 104.28,119.5 103.48,120.3 102.36,120.3
  region net 15V: 30.84,122.21 32.39,122.21 34.76,119.84 34.76,111.64 32.76,111.64 32.76,119.54 31.96,120.34 30.84,120.34
  region net 15V: 102.37,129.51 104.07,129.51 106.32,131.76 106.32,139.56 104.32,139.56 104.32,131.46 103.57,130.71 102.37,130.71
  region net 15V: 30.76,129.54 32.46,129.54 34.66,131.74 34.66,139.54 32.76,139.54 32.76,131.54 31.96,130.74 30.76,130.74
  region net AC3: 185,140.4 185.7,140.4 185.8,140.3
  region net AC1: 190.8,157.7 191,157.9 191.8,157.9
Bottom Layer:
  region net 15V: 181.6,65.7 181.6,29.2 179.4,27 179.5,26.9 179.5,24.4 182.2,24.4 187.1,29.3 187.1,65.4 183.5,65.4 182.4,66.5
  region net 15V: 149.8,100.817 149.8,98.1 150.4,97.5 154.4,97.5 154.4,99.7 155.3,100.6 154.2,101.7 154.2,103.8 151.6,103.8 148.2,100.4 148.2,100.1
  region net 15V: 169.8,124.1 170.4,123.5 170.4,97.6 173.5,97.6 173.3,97.8 173.3,124.9 173,124.6 169.9,124.6
  region net 15V: 189.9,124.8 190.3,124.4 190.3,96.4 192.7,96.4 194.5,98.2 194.5,124.5 194.1,124.9
  region net 15V: 193.035,136.361 193.041,136.355 195.907,136.355 195.907,139.328 195.796,139.439 192.868,139.439 192.868,136.53 193.036,136.362
Multi-Layer:
  region net AC3: 182,147.5 186,147.5 187.2,146.3 187.2,136 182.1,136 182,136.1
  region net AC2: 181,134.6 173,134.6 173,141.2 174.2,142.4 174.2,159.8 181,159.8 181,155.3
  region net AC1: 189.9,159.8 199.2,150.5 199.2,141.5 193.7,141.5 181.4,153.8 181.4,159.8

## Silkscreen, mask and mechanical layers (free items; w line width, h text height)
Top Overlay:
  lines w0.254: 23.2,131.1 31.2,131.1 125.7,131.1 ; 25.083,120.354 25.086,120.357 ; 30.532,120.338 30.548,120.354 ; 30.532,130.997 30.664,130.865 ; 136.1,0 136.36,0.27 136.36,159.89
  text "-" at 51.854,158.692 h1.52
  text "-" at 76.654,158.692 h1.52
  text "+" at 39.254,158.6 h1.52
  text "+" at 64.254,158.5 h1.52
  text "-" at 118.454,158.292 h1.52
  text "MONO" at 99.554,158.254 h1.52
  text "+" at 105.854,158.2 h1.52
  text "Stereo" at 24.554,158.154 h1.52
  text "PSU" at 142.629,158.129 h1.52
  text "5V" at 5.654,67.754 h1.52
  text "MOSI" at 5.654,65.254 h1.52
  text "MISO" at 5.654,62.754 h1.52
  text "RESET" at 5.654,60.154 h1.52
  text "SCK" at 5.754,57.554 h1.52
  text "GND" at 5.754,55.054 h1.52
  text "LEDS" at 6.954,52.754 h1
  text "*" at 54.839,30.656 h1.52

## Text inside footprints (layer, text, board x,y; h text height)
"Display Header": Top Overlay "16" at 44,1 h1.02; Top Overlay "1" at 6.5,1 h1.02
E1: Top Overlay "A1" at 171.4,158.1 h1.5
MUX: Top Overlay "5" at 58.375,1 h1.02; Top Overlay "1" at 48.375,1 h1.02
Volume: Top Overlay "5" at 81,1 h1.02; Top Overlay "1" at 70.775,1 h1.02